# EAGLE board PX4FMUlite_V0_4_routed (EAGLE 6.5.0), part 1 of 2
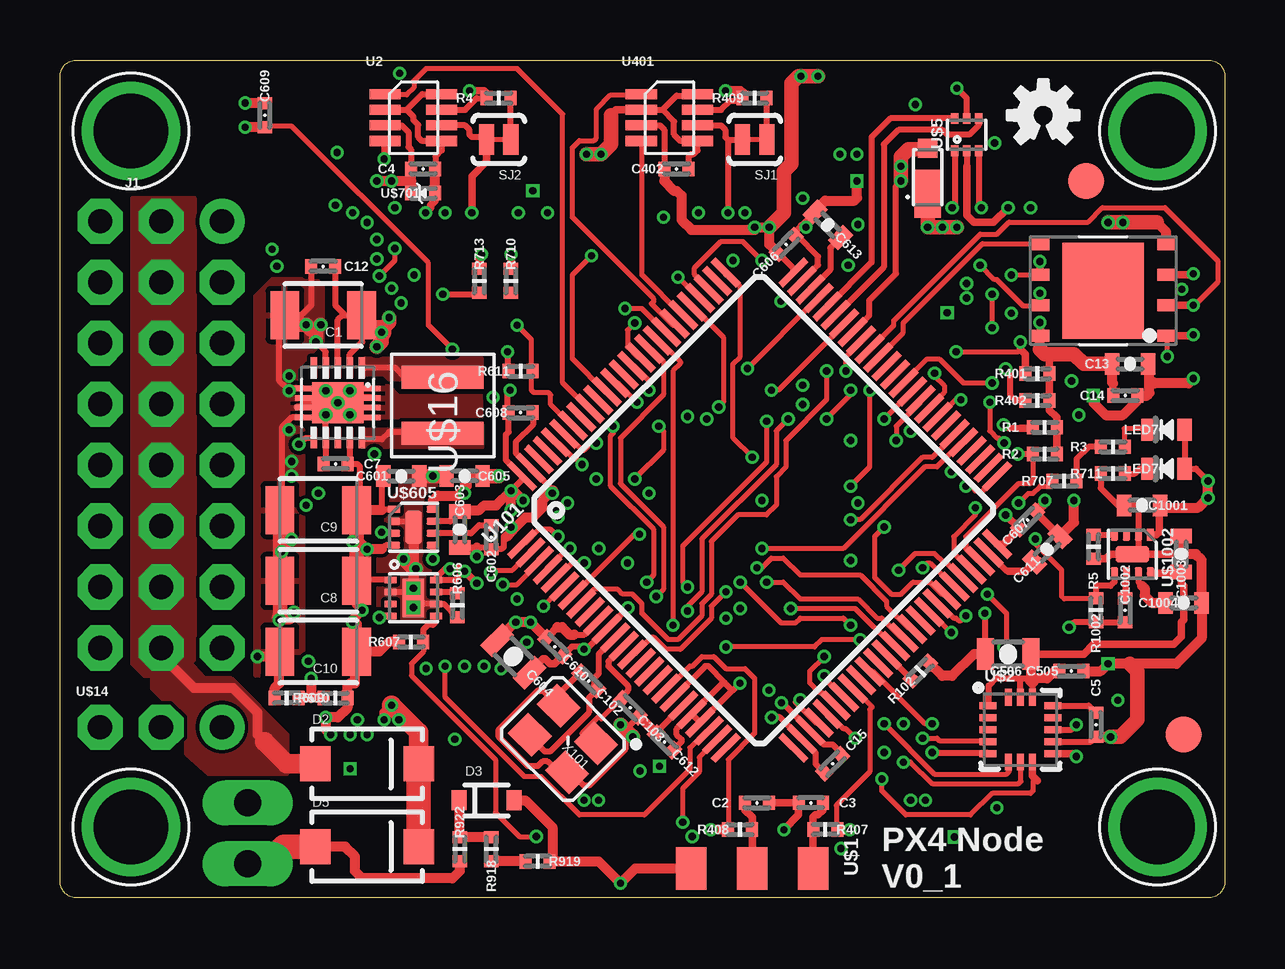
[diagram p0: board, top side]
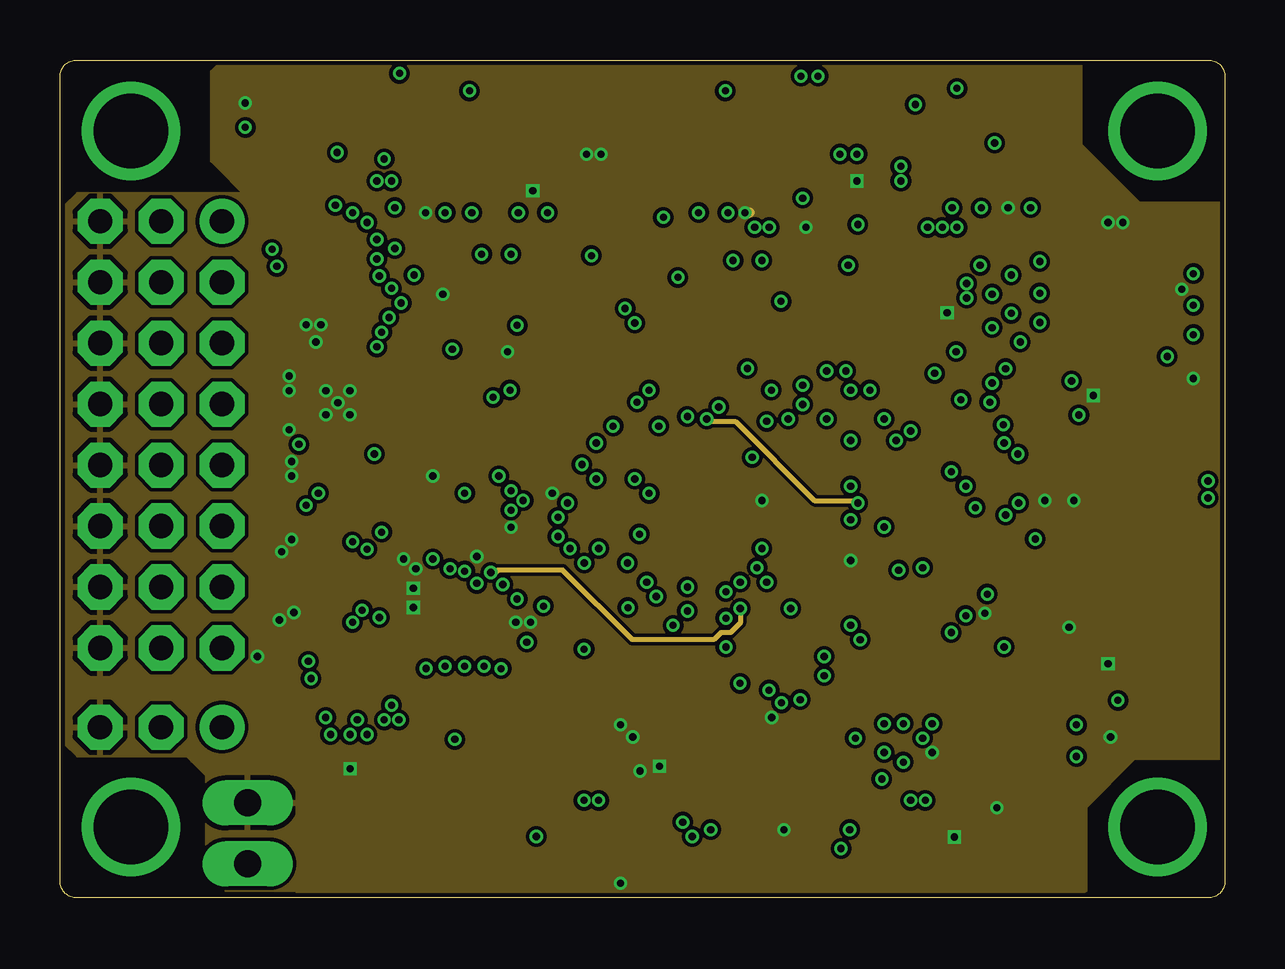
[diagram p1: board, inner layer Ground]
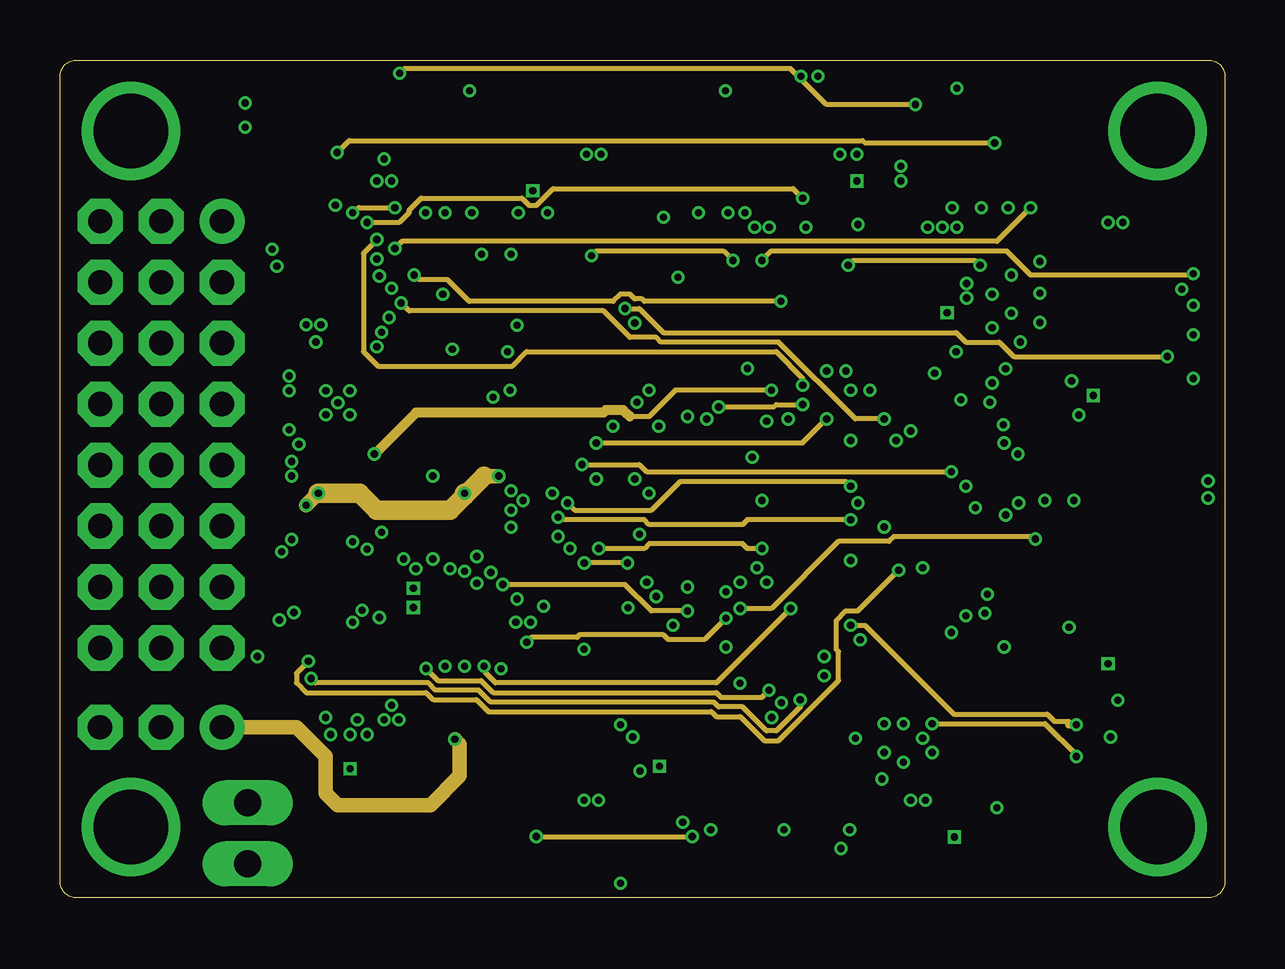
[diagram p2: board, inner layer Horizontal]
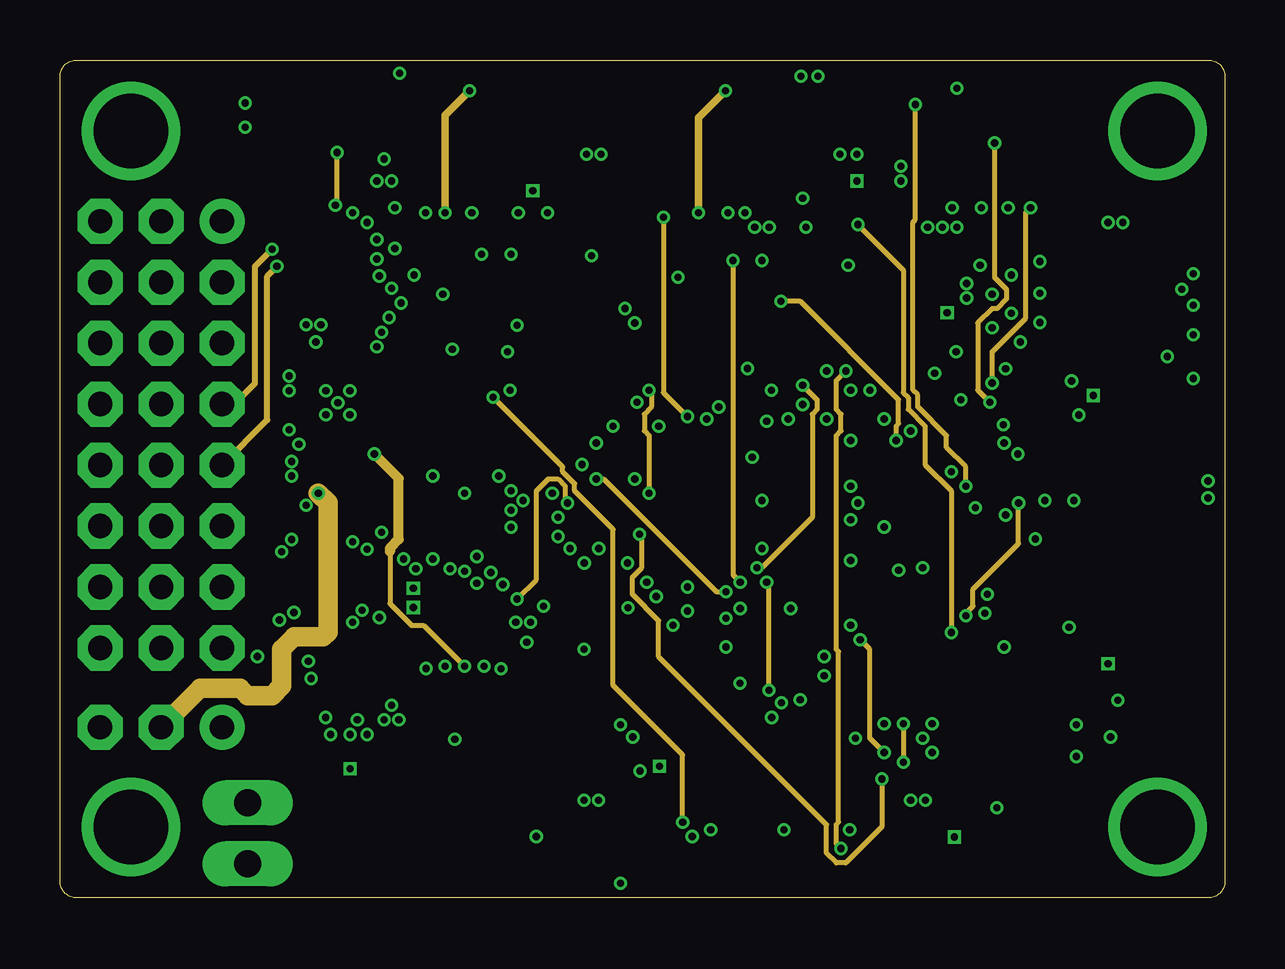
[diagram p3: board, inner layer Vertical]
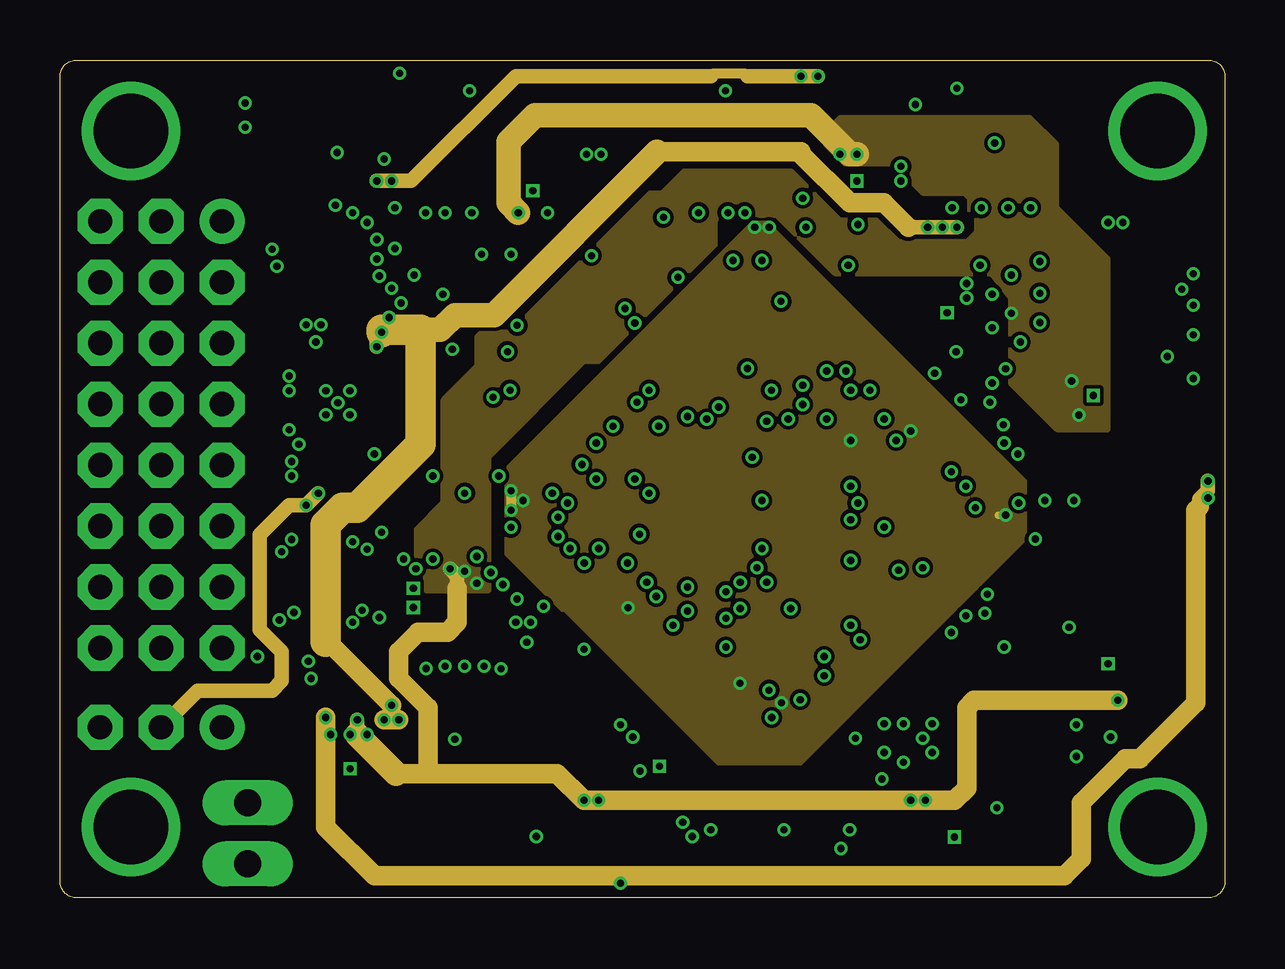
[diagram p4: board, inner layer Power]
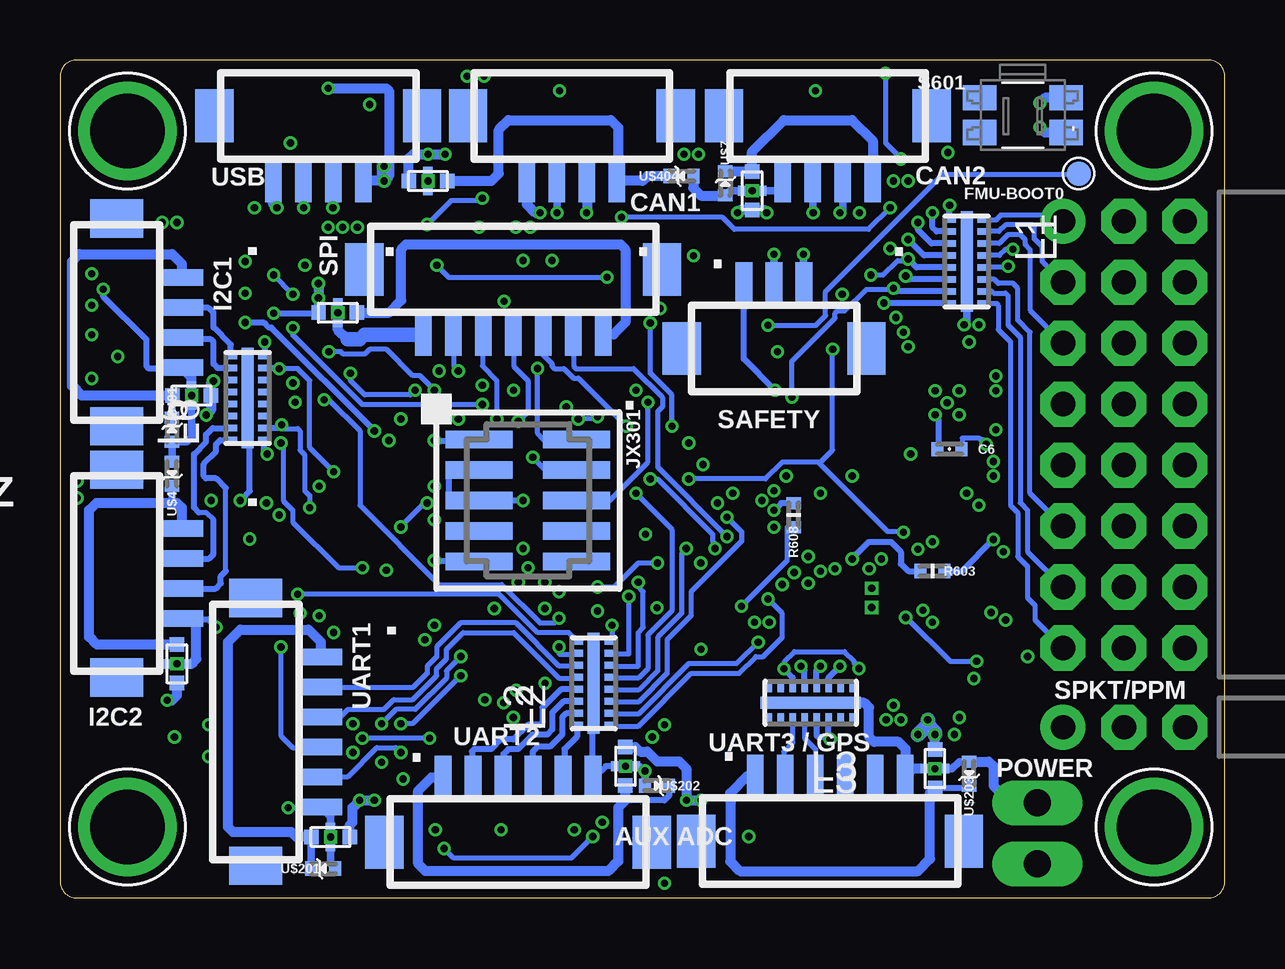
[diagram p5: board, bottom side, seen from below]

Size 48.56 x 34.91 mm. Coordinates in mm from the lower left corner, seen from the top.
Outline: 0,0.7 0,34.21 arc-90 0.7,34.91 47.86,34.91 arc-90 48.56,34.21 48.56,0.7 arc-90 47.86,0 0.7,0 arc-90 0,0.7
Copper layers (1*2*3*14*15*16): Top 0.035mm / dielectric 0.5mm / Ground 0.035mm / dielectric 0.15mm / Horizontal 0.035mm / dielectric 0.15mm / Vertical 0.035mm / dielectric 0.15mm / Power 0.035mm / dielectric 0.5mm / Bottom 0.035mm
Design rules "default *": minimum track width 0.2mm, minimum drill 0.3mm, track to track 0.15mm, track to pad 0.15mm, pad to pad 0.15mm, via to via 0.15mm, smd to smd 0.15mm, copper to edge 0.2mm, drill to drill 0.3mm, minimum pad ring 0.125mm, minimum via ring 0.125mm, stop-mask expansion 1mil, vias tented up to drill 0.31mm, thermal gap 8mil
Net classes: 0 signal: width 0.152 mm, drill 0.2 mm, clearance 0.152 mm; 1 power: width 0.254 mm, drill 0.3 mm, clearance 0.152 mm

## Footprints (pad centres in the part's own frame; a part is rotated, then mirrored left to right if it is on the bottom)
1210 = smd 1.2 x 2: 1 -1.6,0; 2 1.6,0
0402-CAP = smd 0.5 x 0.6: P$1 -0.5,0; P$2 0.5,0
0603-CAP = smd 0.6 x 0.9: P$1 -0.75,0; P$2 0.75,0
0805-CAP = smd 0.7 x 1.3: P$1 -0.95,0; P$2 0.95,0
MICROSMP = smd 0.8 x 0.8: ANODE 0.65,0 | smd 2 x 1.1: CATHODE -1.25,0
SMA-DIODE = smd 1.27 x 1.47: A -2.15,0; C 2.15,0
SOD-323 = smd 0.63 x 0.83: 1 -1.15,0; 2 1.15,0
PAD.04X.04 = smd 1.016 x 1.016: P$1 0,0
3X8RA_SERVO = drill 1.016 pad 1.88 octagon: GND_S1 -3.81,8.89; GND_S2 -3.81,6.35; GND_S3 -3.81,3.81; GND_S4 -3.81,1.27; GND_S5 -3.81,-1.27; GND_S6 -3.81,-3.81; GND_S7 -3.81,-6.35; GND_S8 -3.81,-8.89; PWR_S1 -1.27,8.89; PWR_S2 -1.27,6.35; PWR_S3 -1.27,3.81; PWR_S4 -1.27,1.27; PWR_S5 -1.27,-1.27; PWR_S6 -1.27,-3.81; PWR_S7 -1.27,-6.35; PWR_S8 -1.27,-8.89; S2 1.27,6.35; S3 1.27,3.81; S4 1.27,1.27; S5 1.27,-1.27; S6 1.27,-3.81; S7 1.27,-6.35; S8 1.27,-8.89 | drill 1.016 pad 1.88: S1 1.27,8.89
DF13C-4P-1.25V = smd 1.6 x 2.2: M$0 4.325,-1.8; M$1 -4.325,-1.8 | smd 0.7 x 1.8: P$1 -1.875,0.9; P$2 -0.625,0.9; P$3 0.625,0.9; P$4 1.875,0.9
DF13C-6P-1.25V = smd 1.6 x 2.2: M$0 5.575,-1.8; M$1 -5.575,-1.8 | smd 0.7 x 1.8: P$1 -3.125,0.9; P$2 -1.875,0.9; P$3 -0.625,0.9; P$4 0.625,0.9; P$5 1.875,0.9; P$6 3.125,0.9
DF13C-7P-1.25V = smd 1.6 x 2.2: M$0 6.2,-1.8; M$1 -6.2,-1.8 | smd 0.7 x 1.8: P$1 -3.75,0.9; P$2 -2.5,0.9; P$3 -1.25,0.9; P$4 0,0.9; P$5 1.25,0.9; P$6 2.5,0.9; P$7 3.75,0.9
DF13C-3P-1.25V = smd 1.6 x 2.2: M$0 3.85,-1.8; M$1 -3.85,-1.8 | smd 0.7 x 1.8: P$1 -1.25,0.9; P$2 0,0.9; P$3 1.25,0.9
FIDUCIAL-1.5X3 = smd 1.5 x 1.5: 1 0,0
1X02_LONGPADS = drill 1.118 pad 1.88 long: 1 0,0; 2 2.54,0
FTSH-105-01-XXX-DV-K = smd 0.737 x 2.794: 1 -2.54,-2.032; 2 -2.54,2.032; 3 -1.27,-2.032; 4 -1.27,2.032; 5 0,-2.032; 6 0,2.032; 7 1.27,-2.032; 8 1.27,2.032; 9 2.54,-2.032; 10 2.54,2.032
DFN16-THIN = smd 0.28 x 0.51: P$1 -1.75,-0.7; P$2 -1.25,-0.7; P$3 -0.75,-0.7; P$4 -0.25,-0.7; P$5 0.25,-0.7; P$6 0.75,-0.7; P$7 1.25,-0.7; P$8 1.75,-0.7; P$9 1.75,0.7; P$10 1.25,0.7; P$11 0.75,0.7; P$12 0.25,0.7; P$13 -0.25,0.7; P$14 -0.75,0.7; P$15 -1.25,0.7; P$16 -1.75,0.7 | smd 4.2 x 0.5: P$EP 0,0
KYOCERA-KNH16-DA = smd 0.6 x 0.6: P$1 -0.8,0; P$2 0.8,0 | smd 0.4 x 0.4: P$3 0,-0.4; P$4 0,0.4 | drill 0.3 pad 0.4 square: P$5 0,0
0603-LED = smd 0.6 x 0.9: A 0.75,0; C -0.75,0
MOUNT-HOLE3.1 = drill 3.1 pad 4.1: P$1 0,0
0402-RES = smd 0.5 x 0.6: P$1 -0.5,0; P$2 0.5,0
EVQP7J01K = smd 1.4 x 1.05: A1 -1.8,0.725; A2 1.8,0.725; B3 -1.8,-0.725; B4 1.8,-0.725
SJ_2S-TRACE = smd 0.635 x 1.27: 1 -0.508,0; 2 0.508,0
SOT23-8 = smd 0.42 x 1.3: 1 -0.975,-1.175; 2 -0.325,-1.175; 3 0.325,-1.175; 4 0.975,-1.175; 5 0.975,1.175; 6 0.325,1.175; 7 -0.325,1.175; 8 -0.975,1.175
TQFP100 = smd 1.5 x 0.29: 1 -8,6; 2 -8,5.5; 3 -8,5; 4 -8,4.5; 5 -8,4; 6 -8,3.5; 7 -8,3; 8 -8,2.5; 9 -8,2; 10 -8,1.5; 11 -8,1; 12 -8,0.5; 13 -8,0; 14 -8,-0.5; 15 -8,-1; 16 -8,-1.5; 17 -8,-2; 18 -8,-2.5; 19 -8,-3; 20 -8,-3.5; 21 -8,-4; 22 -8,-4.5; 23 -8,-5; 24 -8,-5.5; 25 -8,-6; 51 8,-6; 52 8,-5.5; 53 8,-5; 54 8,-4.5; 55 8,-4; 56 8,-3.5; 57 8,-3; 58 8,-2.5; 59 8,-2; 60 8,-1.5; 61 8,-1; 62 8,-0.5; 63 8,0; 64 8,0.5; 65 8,1; 66 8,1.5; 67 8,2; 68 8,2.5; 69 8,3; 70 8,3.5; 71 8,4; 72 8,4.5; 73 8,5; 74 8,5.5; 75 8,6 | smd 0.29 x 1.5: 26 -6,-8; 27 -5.5,-8; 28 -5,-8; 29 -4.5,-8; 30 -4,-8; 31 -3.5,-8; 32 -3,-8; 33 -2.5,-8; 34 -2,-8; 35 -1.5,-8; 36 -1,-8; 37 -0.5,-8; 38 0,-8; 39 0.5,-8; 40 1,-8; 41 1.5,-8; 42 2,-8; 43 2.5,-8; 44 3,-8; 45 3.5,-8; 46 4,-8; 47 4.5,-8; 48 5,-8; 49 5.5,-8; 50 6,-8; 76 6,8; 77 5.5,8; 78 5,8; 79 4.5,8; 80 4,8; 81 3.5,8; 82 3,8; 83 2.5,8; 84 2,8; 85 1.5,8; 86 1,8; 87 0.5,8; 88 0,8; 89 -0.5,8; 90 -1,8; 91 -1.5,8; 92 -2,8; 93 -2.5,8; 94 -3,8; 95 -3.5,8; 96 -4,8; 97 -4.5,8; 98 -5,8; 99 -5.5,8; 100 -6,8
HEADER_3X01_SMD_H_BOARD_EDGE_SHORT = smd 1.27 x 1.778: 1 -2.54,0; 2 0,0; 3 2.54,0
16LGA-3X3 = smd 0.7 x 0.3: 1 -1.35,1; 2 -1.35,0.5; 3 -1.35,0; 4 -1.35,-0.5; 5 -1.35,-1; 9 1.35,-1; 10 1.35,-0.5; 11 1.35,0; 12 1.35,0.5; 13 1.35,1 | smd 0.3 x 0.7: 6 -0.5,-1.35; 7 0,-1.35; 8 0.5,-1.35; 14 0.5,1.35; 15 0,1.35; 16 -0.5,1.35
WSON-8-5X6 = smd 0.5 x 0.75: 1 -1.875,-2.625; 2 -0.605,-2.625; 3 0.665,-2.625; 4 1.935,-2.625; 5 1.935,2.625; 6 0.665,2.625; 7 -0.605,2.625; 8 -1.875,2.625 | smd 4 x 3.4: PAD 0,0
0402-TVS = smd 0.5 x 0.6: A 0.5,0; C -0.5,0
SOT563-6 = smd 0.3 x 0.45: 1 -0.5,-0.675; 2 0,-0.675; 3 0.5,-0.675; 4 0.5,0.675; 5 0,0.675; 6 -0.5,0.675
3X1RA = drill 1.016 pad 1.88: 1 5.08,0 | drill 1.016 pad 1.88 octagon: 2 2.54,0; 3 0,0
PWSON10 = smd 0.28 x 0.85: 1 -1,-1.475; 2 -0.5,-1.475; 3 0,-1.475; 4 0.5,-1.475; 5 1,-1.475; 10 1,1.475; 11 0.5,1.475; 12 0,1.475; 13 -0.5,1.475; 14 -1,1.475 | smd 0.7 x 0.23: 6 1.425,-0.6; 7 1.425,-0.2; 8 1.425,0.2; 9 1.425,0.6; 15 -1.425,0.6; 16 -1.425,0.2; 17 -1.425,-0.2; 18 -1.425,-0.6 | drill 0.3 pad 0.406: 19 0.5,0.5; 20 0.5,-0.5; 21 -0.5,-0.5; 22 -0.5,0.5; 23 0,0 | smd 2.15 x 1.7: EP 0,0
XFL4020 = smd 0.965 x 3.404: 1 -1.168,0; 2 1.168,0
QFN8-DSG = smd 0.28 x 0.5: 1 -0.75,-0.95; 2 -0.25,-0.95; 3 0.25,-0.95; 4 0.75,-0.95; 5 0.75,0.95; 6 0.25,0.95; 7 -0.25,0.95; 8 -0.75,0.95 | smd 1.6 x 0.9: GND 0,0 | drill 0.3 square: P$2 -0.4,0; P$3 0.4,0
MLF-8-EPAD = smd 0.5 x 0.3: 1 -0.8,0.75; 2 -0.8,0.25; 3 -0.8,-0.25; 4 -0.8,-0.75; 5 0.8,-0.75; 6 0.8,-0.25; 7 0.8,0.25; 8 0.8,0.75 | smd 0.7 x 1.4: GND 0,0
OSCILLATOR-3.2X2.5 = smd 1.4 x 1.2: 1 -1.1,-0.85; 2 1.1,-0.85; 3 1.1,0.85; 4 -1.1,0.85

## Placement (x,y rotation side)
C1  22uF  [1210]  10.97,24.28 180 top
C2  0u1  [0402-CAP]  29.06,3.96 0 top
C3  0u1  [0402-CAP]  31.29,3.96 180 top
C4  0u1  [0402-CAP]  15.14,30.38 0 top
C5  0u1  [0402-CAP]  43.18,7.21 270 top
C6  0u1  [0402-CAP]  11.48,18.69 180 bottom
C7  0u1  [0402-CAP]  11.48,18.08 180 top
C8  22uF  [1210]  10.77,13.21 180 top
C9  22uF  [1210]  10.77,16.15 180 top
C10  22uF  [1210]  10.77,10.26 180 top
C12  0u1  [0402-CAP]  10.97,26.31 180 top
C13  2u2  [0603-CAP]  44.6,22.25 0 top
C14  0u1  [0402-CAP]  44.4,20.93 0 top
C15  0u1  [0402-CAP]  32.21,5.59 225 top
C102  8p  [0402-CAP]  22.05,9.04 135 top
C103  8p  [0402-CAP]  23.77,7.92 135 top
C402  0u1  [0402-CAP]  25.7,30.38 0 top
C505  10n  [0402-CAP]  42.16,9.45 0 top
C506  10u/10V  [0805-CAP]  39.52,10.16 180 top
C601  2u2  [0603-CAP]  14.22,17.58 0 top
C602  10n  [0402-CAP]  17.98,15.04 90 top
C603  1u0  [0603-CAP]  16.66,15.34 270 top
C604  10u/10V  [0805-CAP]  18.9,10.06 135 top
C605  1u0  [0603-CAP]  16.87,17.58 180 top
C606  0u1  [0402-CAP]  30.28,27.23 45 top
C607  0u1  [0402-CAP]  40.34,15.75 45 top
C608  0u1  [0402-CAP]  19.2,20.22 0 top
C609  0u1  [0402-CAP]  8.53,32.61 270 top
C610  0u1  [0402-CAP]  20.62,10.46 135 top
C611  2u2  [0603-CAP]  41.15,14.53 45 top
C612  0u1  [0402-CAP]  25.2,6.5 135 top
C613  2u2  [0603-CAP]  32,28.04 135 top
C1001  1u0  [0603-CAP]  45.11,16.36 180 top
C1002  10n  [0402-CAP]  44.4,11.99 270 top
C1003  1u0  [0603-CAP]  46.74,14.33 90 top
C1004  1u0  [0603-CAP]  46.84,12.29 0 top
D1  MSS1P4-M3  [MICROSMP]  36.17,30.58 90 top
D2  B340A  [SMA-DIODE]  12.8,5.59 0 top
D3  [SOD-323]  17.78,4.06 0 top
D5  B340A  [SMA-DIODE]  12.8,2.13 0 top
FMU-BOOT0  PAD.04  [PAD.04X.04]  6.1,30.18 0 bottom
J1  [3X8RA_SERVO]  5.49,19.3 0 top
J2  DF13-4P-1.25V  [DF13C-4P-1.25V]  44.4,13.51 270 bottom
J3  DF13C-4P-1.25V  [DF13C-4P-1.25V]  16.56,30.78 180 bottom
J201  DF13C-6P-1.25V  [DF13C-6P-1.25V]  38.6,6.92 270 bottom
J202  DF13C-6P-1.25V  [DF13C-6P-1.25V]  29.47,4.12 0 bottom
J203  DF13C-6P-1.25V  [DF13C-6P-1.25V]  16.46,4.17 0 bottom
J302  DF13C-4P-1.25V  [DF13C-4P-1.25V]  37.8,30.78 180 bottom
J401  DF13C-4P-1.25V  [DF13C-4P-1.25V]  44.4,23.98 270 bottom
J403  DF13C-7P-1.25V  [DF13C-7P-1.25V]  29.67,24.38 180 bottom
J405  DF13C-4P-1.25V  [DF13C-4P-1.25V]  27.23,30.78 180 bottom
J802  DF13C-3P-1.25V  [DF13C-3P-1.25V]  18.8,24.69 0 bottom
JP1  FIDUCIAL1.5X3  [FIDUCIAL-1.5X3]  42.77,29.87 0 top
JP2  FIDUCIAL1.5X3  [FIDUCIAL-1.5X3]  46.84,6.81 0 top
JP5  M02PTH3  [1X02_LONGPADS]  7.82,1.42 90 top
JX301  ARM_MINI_JTAG-SMT  [FTSH-105-01-XXX-DV-K]  29.06,16.56 270 bottom
L1  NUF8402MN  [DFN16-THIN]  10.77,26.52 270 bottom
L2  NUF8402MN  [DFN16-THIN]  26.31,8.94 90 bottom
L3  NUF8402MN  [DFN16-THIN]  17.27,8.13 180 bottom
L4  KNH16C104DA5TS  [KYOCERA-KNH16-DA]  43.08,20.93 180 bottom
L5  KNH16C104DA5TS  [KYOCERA-KNH16-DA]  43.69,9.75 90 bottom
L6  NUF8402MN  [DFN16-THIN]  40.74,20.83 90 bottom
L7  KNH16C104DA5TS  [KYOCERA-KNH16-DA]  19.71,29.46 90 bottom
L201  KNH16C104DA5TS  [KYOCERA-KNH16-DA]  37.29,2.54 180 bottom
L202  KNH16C104DA5TS  [KYOCERA-KNH16-DA]  24.99,5.49 270 bottom
L203  KNH16C104DA5TS  [KYOCERA-KNH16-DA]  12.09,5.38 270 bottom
L402  KNH16C104DA5TS  [KYOCERA-KNH16-DA]  36.98,24.38 0 bottom
L403  KNH16C104DA5TS  [KYOCERA-KNH16-DA]  33.22,29.87 0 bottom
LED701  AMBER  [0603-LED]  46.13,19.51 0 top
LED704  GREEN  [0603-LED]  46.13,17.88 0 top
M3_MOUNT1101  MOUNT-HOLE3.1MM  [MOUNT-HOLE3.1]  2.95,31.96 0 top
M3_MOUNT1102  MOUNT-HOLE3.1MM  [MOUNT-HOLE3.1]  45.75,2.96 0 top
M3_MOUNT1103  MOUNT-HOLE3.1MM  [MOUNT-HOLE3.1]  45.75,31.96 0 top
M3_MOUNT1104  MOUNT-HOLE3.1MM  [MOUNT-HOLE3.1]  2.95,2.96 0 top
OSHW_LOGO  OSHW-LOGOS  [OSHW-LOGO-S]  40.99,32.61 0 top
R1  1K5  [0402-RES]  41.05,19.61 0 top
R2  1K5  [0402-RES]  41.05,18.49 0 top
R3  220R  [0402-RES]  43.89,18.8 0 top
R4  120R  [0402-RES]  18.29,33.32 0 top
R5  10K  [0402-RES]  43.08,14.63 90 top
R102  10K  [0402-RES]  35.86,9.45 45 top
R401  1K5  [0402-RES]  40.74,21.84 0 top
R402  1K5  [0402-RES]  40.74,20.73 0 top
R407  10K/0.1%  [0402-RES]  31.9,2.84 180 top
R408  10K/0.1%  [0402-RES]  28.35,2.84 0 top
R409  120R  [0402-RES]  28.96,33.32 0 top
R603  10K  [0402-RES]  12.19,13.61 180 bottom
R606  25K  [0402-RES]  16.56,12.19 270 top
R607  10K  [0402-RES]  14.63,10.67 0 top
R608  1K  [0402-RES]  17.98,15.95 90 bottom
R609  10K/0.1%  [0402-RES]  11.48,8.33 0 top
R610  10K/0.1%  [0402-RES]  9.45,8.33 180 top
R611  10K  [0402-RES]  19.2,21.95 0 top
R707  220R  [0402-RES]  41.86,17.37 0 top
R710  47R  [0402-RES]  18.8,25.7 270 top
R711  220R  [0402-RES]  43.89,17.68 0 top
R713  1K5  [0402-RES]  17.48,25.7 270 top
R918  10K/0.1%  [0402-RES]  17.98,2.03 90 top
R919  10K/0.1%  [0402-RES]  19.91,1.52 180 top
R922  10K/0.1%  [0402-RES]  16.66,2.03 270 top
R1002  10K  [0402-RES]  43.18,11.99 90 top
S601  RESET  [EVQP7J01K]  8.43,32.61 180 bottom
SJ1  SOLDERJUMPERTRACE  [SJ_2S-TRACE]  28.96,31.6 180 top
SJ2  SOLDERJUMPERTRACE  [SJ_2S-TRACE]  18.29,31.6 180 top
U2  MAX3051  [SOT23-8]  14.73,32.51 270 top
U101  STM32F4X7VX  [TQFP100]  29.16,16.15 45 top
U401  MAX3051  [SOT23-8]  25.4,32.51 270 top
U$1  HEADER-3X1BOARDEDGE-SHORT  [HEADER_3X01_SMD_H_BOARD_EDGE_SHORT]  28.85,1.22 180 top
U$2  MAX21100  [16LGA-3X3]  40.03,7.01 0 top
U$3  W25Q64FV  [WSON-8-5X6]  43.48,25.3 90 top
U$4  PESD0402-140  [0402-TVS]  43.89,17.68 90 bottom
U$5  NUF2042XV6  [SOT563-6]  37.8,31.8 0 top
U$7  PESD0402-140  [0402-TVS]  20.83,29.77 270 bottom
U$14  HEADER-3X1RA  [3X1RA]  1.67,7.11 0 top
U$15  TPS6303X  [PWSON10]  11.58,20.62 180 top
U$16  XFL4020-222MEB  [XFL4020]  15.95,20.52 90 top
U$201  PESD0402-140  [0402-TVS]  37.59,1.22 0 bottom
U$202  PESD0402-140  [0402-TVS]  23.67,4.67 180 bottom
U$203  PESD0402-140  [0402-TVS]  10.67,5.18 90 bottom
U$401  PESD0402-140  [0402-TVS]  43.89,19.51 270 bottom
U$404  PESD0402-140  [0402-TVS]  22.66,30.07 0 bottom
U$604  BQ24315  [QFN8-DSG]  14.73,12.5 270 top
U$605  MIC5332  [MLF-8-EPAD]  14.73,15.44 0 top
U$701  PESD0402-140  [0402-TVS]  15.14,29.36 0 top
U$1002  MIC5332  [MLF-8-EPAD]  44.7,14.33 270 top
X101  3.2x2.5 mm / 24 MHz / 15 ppm  [OSCILLATOR-3.2X2.5]  20.96,6.62 135 top

## Library data of the parts
C1 C8-C10 = SparkFun-Capacitors; PROD_ID: CAP-10381
C2-C7 C12 C14 C15 C402 C606-C610 C612 = pixhawk2; PARTNO: CC0402ZRY5V7BB104
C13 C601 C611 C613 = pixhawk2; PARTNO: C1608Y5V1C225Z
C102 C103 = pixhawk2; PARTNO: C1005C0G1H080C
C505 C602 C1002 = pixhawk2; PARTNO: CC0402KRX7R7BB103
C506 C604 = pixhawk2; PARTNO: CC0805ZKY5V6BB106
C603 C605 C1001 C1003 C1004 = pixhawk2; PARTNO: CC0603ZRY5V7BB105
D1 = pixhawk2; PARTNO: MSS1P4-M3/89A
D2 D5 = SparkFun-DiscreteSemi
D3 = SparkFun-DiscreteSemi; PROD_ID: DIO-09646
FMU-BOOT0 JP1 JP2 M3_MOUNT1101-M3_MOUNT1104 OSHW_LOGO = pixhawk2; BOM: EXCLUDE; PARTNO: *
J1 L1-L3 L6 U$1-U$3 U$5 U$14 U$15 = PX4lite
J2 J3 J302 J401 J405 = con-hirose-df13; PARTNO: DF13C-4P-1.25V(20)
J201-J203 = con-hirose-df13; PARTNO: DF13C-6P-1.25V(20)
J403 = con-hirose-df13; PARTNO: DF13C-7P-1.25V(20)
J802 = con-hirose-df13; PARTNO: DF13C-3P-1.25V(20)
JP5 = SparkFun-Connectors
JX301 = pixhawk2; BOM: EXCLUDE; PARTNO: M50-3900542
L4 L5 L7 L201-L203 L402 L403 = pixhawk2; PARTNO: KNH16C104DA5TS
LED701 = pixhawk2; PARTNO: APTD1608SECK
LED704 = pixhawk2; PARTNO: APTD1608CGCK
R1 R2 R401 R402 R713 = pixhawk2; PARTNO: RC0402FR-071K5L
R3 R707 R711 = pixhawk2; PARTNO: RC0402FR-07220RL
R4 R409 = pixhawk2; PARTNO: RC0402FR-07120RL
R5 R102 R603 R607 R611 R1002 = pixhawk2; PARTNO: RC0402FR-0710KL
R407 R408 R609 R610 R918 R919 R922 = pixhawk2; PARTNO: ERA-2AEB103X
R606 = pixhawk2; PARTNO: RMCF0402FT25K5
R608 = pixhawk2; PARTNO: RC0402FR-071KL
R710 = pixhawk2; PARTNO: RC0402JR-0747RL
S601 = pixhawk2; PARTNO: EVQP7J01K
SJ1 SJ2 = SparkFun-Passives
U2 U401 = pixhawk2; PARTNO: MAX3051EKA
U101 = pixhawk2; PARTNO: STM32F427VI
U$4 U$7 U$201-U$203 U$401 U$404 U$701 = pixhawk2; PARTNO: PESD0402-140
U$16 = ti_tps_soln2; DCR: 0.02; IDC: 3.7; L: 2.2E-6; MANUFACTURER_NAME: Coilcraft; MANUFACTURER_PART_NUMBER: XFL4020-222MEB; VENDOR: Coilcraft
U$604 = pixhawk2; PARTNO: BQ24315DSGR
U$605 U$1002 = pixhawk2; PARTNO: MIC5332-SSYMT
X101 = pixhawk2; PARTNO: NX3225SA-24.000000MHZ

## Nets
5V_S1_FILTERED [power]: J201.P$1 L201.P$2 U$201.C
5V_S2_FILTERED [power]: J202.P$1 L202.P$2 U$202.C
5V_S3_FILTERED [power]: J203.P$1 L203.P$2 U$203.C
!ACCEL_MAG_CS: U101.9
!BARO_CS: U101.88
!EX_VDD_5V_VALID: U101.91
!FMU-LED_AMBER: R707.P$1 U101.43
!FRAM_CS: U101.57
!GYRO_CS: U101.7 U$2.8
!SPI_EXT_NSS: J403.P$5 U101.3
!VDD_5V_PERIPH_EN: R607.P$2 U101.67 U$604.5
!VDD_5V_PERIPH_OC: U101.46 U$604.4
!VDD_SERVO_VALID: U101.93
ACCEL_DRDY: U101.90 U$2.11
ALARM: U101.77
CAN1_H: J405.P$2 R409.P$1 U401.7
CAN1_L: J405.P$3 SJ1.2 U401.6
CAN1_RX: U101.81 U401.4
CAN1_TX: U101.82 U401.1
CAN2_H: J3.P$2 R4.P$1 U2.7
CAN2_L: J3.P$3 SJ2.2 U2.6
CAN2_RX: U2.4 U101.51
CAN2_TX: U2.1 U101.92
FMU-!RESET: C609.P$2 S601.A1 U101.14 U$605.3
FMU-BOOT0: FMU-BOOT0.P$1 R611.P$2 U101.94
FMU-CH1: L1.P$1 U101.45
FMU-CH1-PROT: J1.S1 L1.P$16
FMU-CH2: L1.P$2 U101.44
FMU-CH3: L1.P$3 U101.42
FMU-CH4: L1.P$4 U101.40
FMU-CH5: L1.P$5 U101.60
FMU-CH6: L1.P$6 U101.62
FMU-CH7: L1.P$7 U101.24
FMU-CH8: L1.P$8 U101.61
FMU-CH9: U101.25
FMU-CH10: U101.26
FMU-I2C1_SCL: L6.P$8 R401.P$1 U101.95
FMU-I2C1_SDA: L6.P$7 R402.P$1 U101.96
FMU-I2C2_SCL: L6.P$2 R1.P$1 U101.47
FMU-I2C2_SDA: L6.P$1 R2.P$1 U101.48
FMU-LED_SAFETY: R710.P$2
FMU-SWCLK: JX301.4 U101.76
FMU-SWDIO: JX301.2 U101.72
FMU-SWO: JX301.6 U101.89
FMU-UART7_RX: L3.P$5 U101.38
FMU-UART7_TX: L3.P$6 U101.39
FMU-UART8_RX: U101.97
FMU-UART8_TX: U101.98
FMU-USART2_CTS: L2.P$8 U101.84
FMU-USART2_RTS: L2.P$7 U101.85
FMU-USART2_RX: L2.P$5 U101.87
FMU-USART2_TX: L2.P$6 U101.86
FMU-USART3_CTS: L2.P$2 U101.58
FMU-USART3_RTS: L2.P$1 U101.59
FMU-USART3_RX: L2.P$3 U101.56
FMU-USART3_TX: L2.P$4 U101.55
FMU-VDD_3V3 [power]: C4.P$1 C13.P$1 C14.P$1 C15.P$1 C402.P$1 C603.P$1 C604.P$1 C606.P$1 C607.P$1 C608.P$1 C610.P$1 C612.P$1 J802.P$1 JX301.1 R1.P$2 R2.P$2 R401.P$2 R402.P$2 R608.P$2 U2.3 U101.11 U101.19 U101.21 U101.22 U101.28 U101.50 U101.75 U101.100 U401.3 U$3.8 U$605.7 U$701.C
FMU_AUX_ADC1: R408.P$1 U101.18
FMU_AUX_ADC1_PROT: C2.P$1 R408.P$2 U$1.2
FMU_AUX_ADC2: R407.P$1 U101.33
FMU_AUX_ADC2_PROT: C3.P$1 R407.P$2 U$1.1
FRAM_MISO: U101.53
FRAM_MOSI: U101.54
FRAM_SCK: U101.52
GND [power]: C1.2 C2.P$2 C3.P$2 C4.P$2 C5.P$2 C6.P$2 C7.P$2 C8.2 C9.2 C10.2 C12.P$2 C13.P$2 C14.P$2 C15.P$2 C102.P$2 C103.P$1 C402.P$2 C505.P$2 C506.P$2 C601.P$2 C602.P$1 C603.P$2 C604.P$2 C605.P$2 C606.P$2 C607.P$2 C608.P$2 C609.P$1 C610.P$2 C611.P$2 C612.P$2 C613.P$2 C1001.P$2 C1002.P$2 C1003.P$2 C1004.P$2 D3.2 J1.GND_S1 J1.GND_S2 J1.GND_S3 J1.GND_S4 J1.GND_S5 J1.GND_S6 J1.GND_S7 J1.GND_S8 J2.P$4 J3.P$4 J201.P$6 J202.P$6 J203.P$6 J302.P$4 J401.P$4 J403.P$7 J405.P$4 JP5.2 JX301.3 JX301.5 JX301.9 L1.P$EP L2.P$EP L3.P$EP L4.P$3 L4.P$4 L4.P$5 L5.P$3 L5.P$4 L5.P$5 L6.P$EP L7.P$3 L7.P$4 L7.P$5 L201.P$3 L201.P$4 L201.P$5 L202.P$3 L202.P$4 L202.P$5 L203.P$3 L203.P$4 L203.P$5 L402.P$3 L402.P$4 L402.P$5 L403.P$3 L403.P$4 L403.P$5 R5.P$1 R102.P$2 R603.P$1 R606.P$2 R610.P$2 R611.P$1 R711.P$1 R713.P$2 R919.P$1 R1002.P$1 S601.B3 U2.2 U2.5 U2.8 U101.10 U101.20 U101.27 U101.74 U101.99 U401.2 U401.5 U401.8 U$1.3 U$2.5 U$2.10 U$3.4 U$4.A U$5.2 U$7.A U$14.3 U$15.4 U$15.6 U$15.7 U$15.8 U$15.9 U$15.11 U$15.15 U$15.16 U$15.17 U$15.18 U$15.19 U$15.20 U$15.21 U$15.22 U$15.23 U$15.EP U$201.A U$202.A U$203.A U$401.A U$404.A U$604.2 U$604.6 U$604.GND U$604.P$2 U$604.P$3 U$605.2 U$605.GND U$701.A U$1002.2 U$1002.GND X101.2 X101.4
GPIO_EXT_1: J403.P$6 U101.8
GYRO_DRDY: U101.35 U$2.9
IO-!RESET: U$1002.3
MAG_DRDY: U101.36
N$1: C103.P$2 U101.13 X101.1
N$2: C102.P$1 U101.12 X101.3
N$4: J2.P$2 L6.P$15
N$6: D3.1 R918.P$2 R922.P$1
N$7: LED704.C R711.P$2
N$8: C613.P$1 U101.73
N$10: U$15.14 U$16.1
N$11: C602.P$2 U$605.6
N$12: C611.P$1 U101.49
N$13: R3.P$1 R707.P$2
N$15: J1.S8 L1.P$9
N$16: J1.S7 L1.P$10
N$17: U$15.1 U$16.2
N$18: L3.P$13 L3.P$14 U$14.1
N$20: J2.P$3 L6.P$16
N$21 [power]: J2.P$1 L5.P$2 U$4.C
N$22: R409.P$2 SJ1.1
N$26: LED701.C R3.P$2
N$27: C6.P$1 U$15.10
N$28 [power]: J3.P$1 L7.P$2 U$7.C
N$29: R4.P$2 SJ2.1
N$33: J401.P$2 L6.P$9
N$34: R606.P$1 U$604.7
N$36: J1.S6 L1.P$11
N$37: J401.P$3 L6.P$10
N$41 [power]: J403.P$1 L402.P$2
N$42 [power]: J401.P$1 L4.P$2 U$401.C
N$48 [power]: J405.P$1 L403.P$2 U$404.C
N$57: J802.P$2 R710.P$1
N$68: J1.S5 L1.P$12
N$77: J1.S4 L1.P$13
N$78: J1.S3 L1.P$14
N$79: J1.S2 L1.P$15
N$104: C1002.P$1 U$1002.6
OTG_DM1: J302.P$3 U$5.3
OTG_DP1: J302.P$2 U$5.1
OTG_FS_DM: U101.70 U$5.4
OTG_FS_DP: U101.71 U$5.6
PB2-BOOT1: R102.P$1 U101.37
PPM_INPUT: L3.P$3 U101.23
REGD: C5.P$1 U$2.13
SAFETY: J802.P$3 R713.P$1
SDIO_CK: U101.80 U$3.6
SDIO_CMD: U101.83 U$3.1
SDIO_D0: U101.65 U$3.5
SDIO_D1: U101.66 U$3.2
SDIO_D2: U101.78 U$3.3
SDIO_D3: U101.79 U$3.7
SERIAL1_CTS: J201.P$4 L2.P$9
SERIAL1_RTS: J201.P$5 L2.P$10
SERIAL1_RX: J201.P$3 L2.P$12
SERIAL1_TX: J201.P$2 L2.P$11
SERIAL2_CTS: J202.P$4 L2.P$15
SERIAL2_RTS: J202.P$5 L2.P$16
SERIAL2_RX: J202.P$3 L2.P$14
SERIAL2_TX: J202.P$2 L2.P$13
SERIAL3_RX: J203.P$3 L3.P$12
SERIAL3_TX: J203.P$2 L3.P$11
SPEKTRUM_RX: L3.P$4 U101.69
SPI_EXT_MISO: J403.P$3 U101.4
SPI_EXT_MOSI: J403.P$4 U101.5
SPI_EXT_SCK: J403.P$2 U101.1
SPI_INT_MISO: U101.31 U$2.7
SPI_INT_MOSI: U101.32 U$2.6
SPI_INT_SCK: U101.30 U$2.4
V_EXT [power]: D5.A JP5.1 R922.P$2
V_SERVO [power]: D2.A J1.PWR_S1 J1.PWR_S2 J1.PWR_S3 J1.PWR_S4 J1.PWR_S5 J1.PWR_S6 J1.PWR_S7 J1.PWR_S8
VBAT: R608.P$1 U101.6
VBUS [power]: D1.ANODE J302.P$1 U101.68 U$5.5
VDD_3V3_PERIPH [power]: C1004.P$1 U$1002.7
VDD_3V3_PERIPH_EN [power]: R5.P$2 U$1002.4
VDD_3V3_SENSORS [power]: C505.P$1 C506.P$1 C1003.P$1 U$2.1 U$2.14 U$2.15 U$1002.8
VDD_3V3_SENSORS_EN: R1002.P$2 U101.2 U$1002.5
VDD_3V3_SPEKTRUM [power]: C605.P$1 U$14.2 U$605.8
VDD_3V3_SPEKTRUM_EN: R603.P$2 U$605.5
VDD_5V [power]: C7.P$1 C8.1 C9.1 C10.1 C601.P$1 C1001.P$1 LED701.A LED704.A R607.P$1 R609.P$2 U$15.13 U$604.1 U$605.1 U$605.4 U$1002.1
VDD_5V_PERIPH [power]: L4.P$1 L5.P$1 L7.P$1 L201.P$1 L202.P$1 L203.P$1 L402.P$1 L403.P$1 U$604.8
VDD_5V_SENS: R609.P$1 R610.P$1 U101.29
VDD_IN [power]: C1.1 C12.P$1 D1.CATHODE D2.C D5.C U$15.2 U$15.3
VDD_SERVO_SENS: R918.P$1 R919.P$2